# EAGLE board Mod_Pots (EAGLE 6.4)
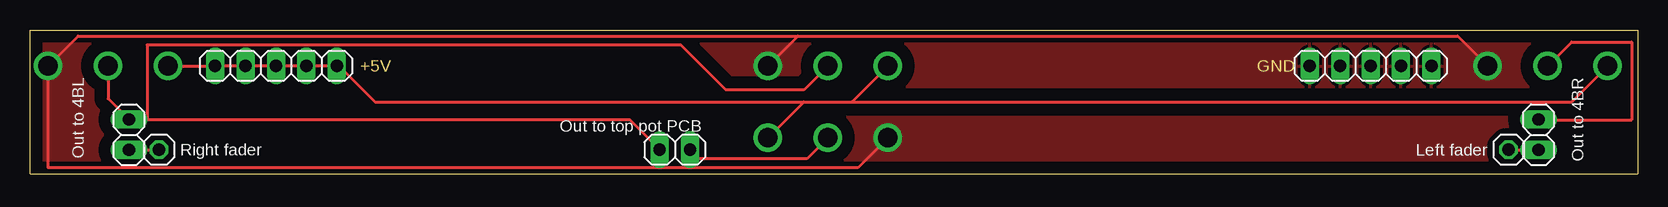
[diagram p0: board, top side]

Size 134 x 12 mm. Coordinates in mm from the lower left corner, seen from the top.
Outline: 0,12 134,12 134,0 0,0 0,12
Copper layers (1*16): Top 0.035mm / dielectric 1.5mm / Bottom 0.035mm
Design rules "default *": minimum track width 10mil, minimum drill 24mil, track to track 8mil, track to pad 8mil, pad to pad 8mil, via to via 8mil, smd to smd 8mil, copper to edge 10mil, drill to drill 8mil, minimum pad ring 10mil, minimum via ring 8mil, stop-mask expansion 4mil, vias tented up to drill 0mil, thermal gap 10mil

## Footprints (pad centres in the part's own frame; a part is rotated, then mirrored left to right if it is on the bottom)
1X01 = drill 1.016 octagon: 1 0,0
1X02 = drill 1.016 long: 1 -1.27,0; 2 1.27,0
1X05 = drill 1.016 long: 1 -5.08,0; 2 -2.54,0; 3 0,0; 4 2.54,0; 5 5.08,0

## Placement (x,y rotation side)
E$1  [1X01]  10.75,2 0 top
E$2  [1X01]  123.25,2 0 top
E$3  [1X02]  53.75,2 0 top
E$4  [1X05]  111.75,9 0 top
E$5  [1X05]  20.5,9 0 top
E$6  [1X02]  8.25,3.25 90 top
E$7  [1X02]  125.75,3.25 90 top

## Library data of the parts
E$1-E$7 = pinhead

## Nets
GND: E$4.1 E$4.2 E$4.3 E$4.4 E$4.5
P_CUE/MAIN_VOLUME: E$3.1
P_DISK_FUNCTION: E$3.2
P_H_VOL: E$7.2
P_LEFT_FADER: E$2.1 E$7.1
P_M/H_BALANCE: E$6.2
POWER: E$5.1 E$5.2 E$5.3 E$5.4 E$5.5
S$1: E$1.1 E$6.1

## Tracks (layer width: path | path; a pad name or v marks a point on that pad's centre or on a via)
GND  (via drill 1.6)
  Top 0.254: v71.5,3 69,0.5 1.5,0.5 v1.5,9 4,11.5 64,11.5 | 64,11.5 v61.5,9 | 64,11.5 119,11.5 v121.5,9
  pour Top (isolate 1.016): -0.25,12.25 134.25,12.25 134.25,-0.25 -0.25,-0.25
P_CUE/MAIN_VOLUME  (via drill 1.6)
  Top 0.254: v66.5,9 64.5,7 58,7 54.25,10.75 9.75,10.75 9.75,4.5 50,4.5 52.48,2.02 E$3.1
P_DISK_FUNCTION  (via drill 1.6)
  Top 0.254: E$3.2 55,2 55,1.25 64.75,1.25 v66.5,3
P_H_VOL  (via drill 1.6)
  Top 0.254: E$7.2 125.75,4.5 133.5,4.5 133.5,11 128.5,11 v126.5,9
P_LEFT_FADER
  Top 0.254: E$2.1 125.75,2 E$7.1
P_M/H_BALANCE  (via drill 1.6)
  Top 0.254: v6.5,9 6.5,6.27 E$6.2
POWER  (via drill 1.6)
  Top 0.254: 64.5,6 68.5,6 | 68.5,6 v71.5,9 | v61.5,3 64.5,6 | 68.5,6 128.5,6 v131.5,9 | 64.5,6 28.75,6 25.75,9 E$5.5 E$5.4 E$5.3 E$5.2 E$5.1 v11.5,9
S$1
  Top 0.254: E$6.1 10.75,1.98 E$1.1

## Text on the board
Dimension: +5V | GND
tNames: Out to top pot PCB | Left fader | Out to 4BL | Right fader | Out to 4BR